# Altium PCB Nibbler_PC.PcbDoc (part 1 of 2)
Units mm, origin at the board's own origin, x right, y up, seen from the top; angles counter-clockwise.
Board outline 160.02 x 119.89 mm, 2 copper layers (Top Layer, Bottom Layer); 63 components, 94 nets, 437 pads, 181 vias.
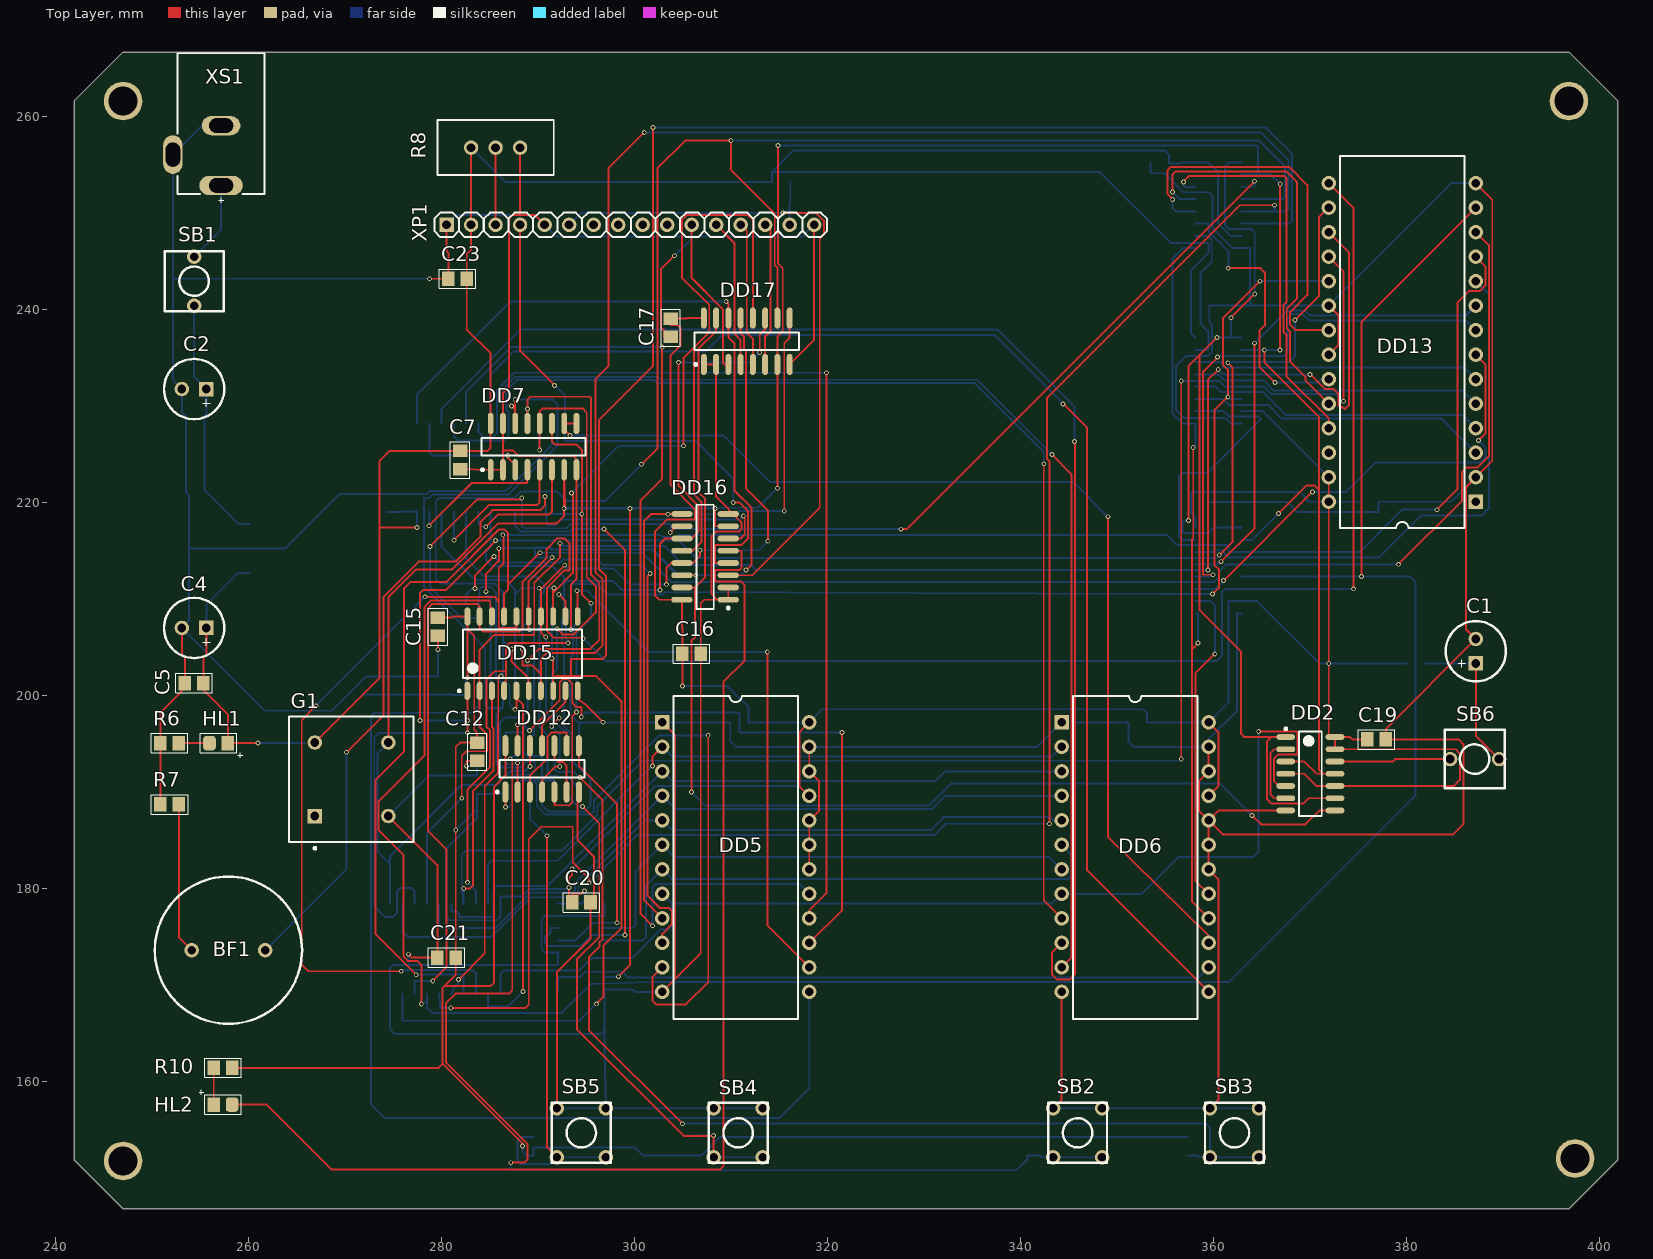
[diagram p0: Top Layer view]
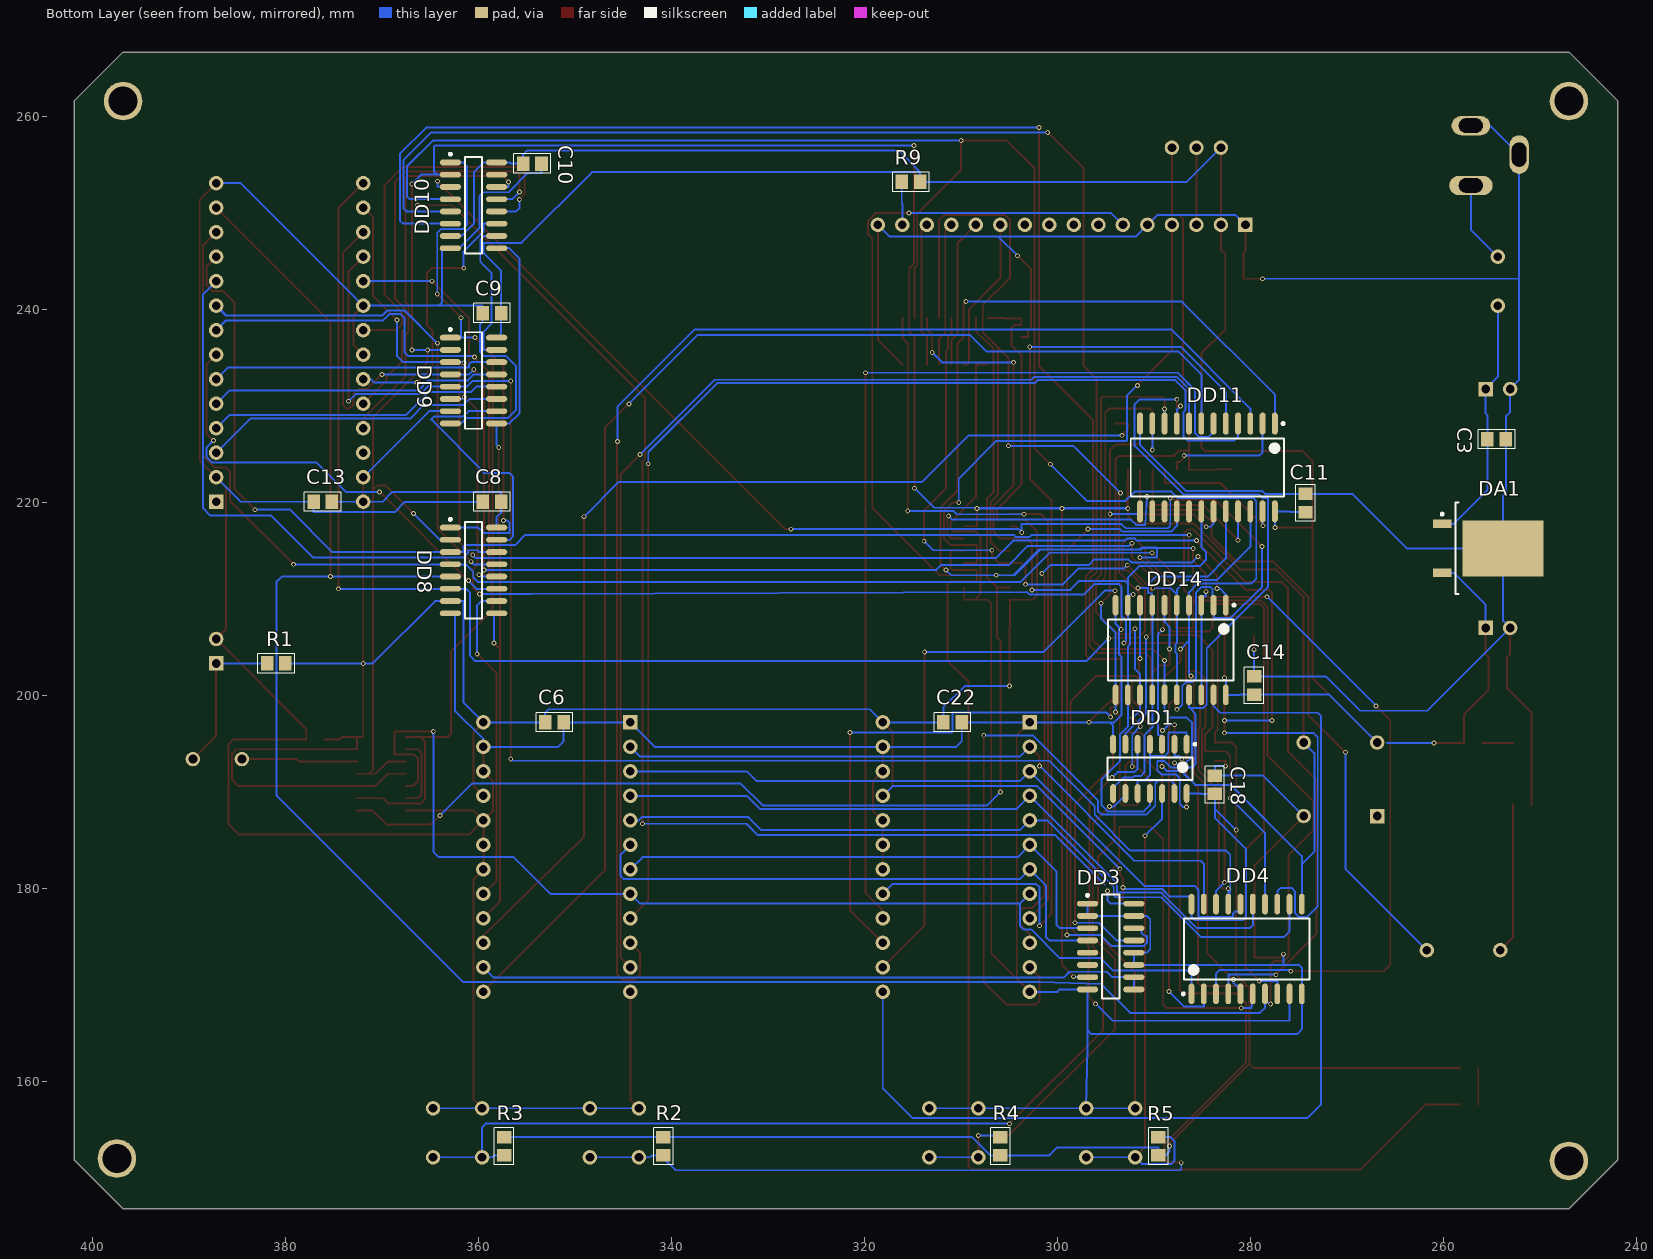
[diagram p1: Bottom Layer view, seen from below]

## Layer stack, top to bottom
Top Solder: solder mask 0.0102, Solder Resist, Dk 3.5
Top Layer: signal copper 0.0356
Dielectric 1: dielectric 0.32, FR-4, Dk 4.8
Bottom Layer: signal copper 0.0356
Bottom Solder: solder mask 0.0102, Solder Resist, Dk 3.5

## Board outline
241.935,151.892 241.935,261.62 247.015,266.7 396.875,266.7 401.955,261.62 401.955,151.892 396.875,146.812 247.015,146.812

## Design rules (kind name [scope] priority, off if disabled: settings)
Clearance [All] p1: gap=0.15
PolygonConnect [All] p1: connectstyle=Relief reliefconductorwidth=0.254 reliefentries=4 polygonreliefangle="90 Angle" airgapwidth=0.254
RoutingVias [All] p1: holewidth=0.3 width=0.5 viastyle="Through Hole" minholewidth=0.3 minwidth=0.5 maxholewidth=0.3 maxwidth=0.5
SolderMaskExpansion [All] p1: expansion=0.102
Width [All] p1: maxlimit=0.25 minlimit=0.15 preferedwidth=0.2
29 further rules are at their usual default settings.

## Components (designator, comment, footprint, x,y, rotation, side; value= is the part's Value field where it differs from the comment)
BF1 "BUZZER" BUZZER 257.937,173.609 r0 top
C1 "EL_CAPACITOR" ELECTROLITE 387.223,204.597 r180 top
C2 "EL_CAPACITOR" ELECTROLITE 254.381,231.775 r270 top
C3 "CAPACITOR" C0805 254.508,226.568 r180 bottom
C4 "EL_CAPACITOR" ELECTROLITE 254.381,207.01 r270 top
C5 "CAPACITOR" C0805 254.381,201.295 r180 top
C6 "CAPACITOR" C0805 352.171,197.231 r180 bottom
C7 "CAPACITOR" C0805 281.94,224.409 r270 top
C8 "CAPACITOR" C0805 358.648,220.083 r0 bottom
C9 "CAPACITOR" C0805 358.648,239.641 r0 bottom
C10 "CAPACITOR" C0805 354.457,255.135 r180 bottom
C11 "CAPACITOR" C0805 274.32,219.964 r90 bottom
C12 "CAPACITOR" C0805 283.718,194.183 r270 top
C13 "CAPACITOR" C0805 376.174,220.091 r0 bottom
C14 "CAPACITOR" C0805 279.654,201.041 r90 bottom
C15 "CAPACITOR" C0805 279.654,207.137 r270 top
C16 "CAPACITOR" C0805 305.943,204.343 r0 top
C17 "CAPACITOR" C0805 303.784,238.125 r270 top
C18 "CAPACITOR" C0805 283.718,190.754 r90 bottom
C19 "CAPACITOR" C0805 376.936,195.453 r0 top
C20 "CAPACITOR" C0805 294.513,178.562 r0 top
C21 "CAPACITOR" C0805 280.543,172.847 r180 top
C22 "CAPACITOR" C0805 310.896,197.231 r180 bottom
C23 "CAPACITOR" C0805 281.686,243.205 r180 top
DA1 "LM7805" DPAK254P1054X203-3N 255.397,215.265 r180 bottom
DD1 "74HCT125" SOIC-14 290.449,192.405 r270 bottom
DD2 "74HCT74" SOIC-14 370.078,191.897 r0 top
DD3 "74HCT173" SOIC-16 294.513,173.99 r180 bottom
DD4 "74HCT377" SOIC-20 280.416,173.736 r90 bottom
DD5 "28C16" DIP-24 309.245,174.371 r270 top
DD6 "28C16" DIP-24 350.647,174.371 r270 top
DD7 "74HCT173" SOIC-16 289.56,225.806 r90 top
DD8 "74HCT163" M16A_N 360.553,212.971 r180 bottom
DD9 "74HCT163" M16A_N 360.553,232.656 r180 bottom
DD10 "74HCT163" M16A_N 360.553,250.817 r180 bottom
DD11 "74LS181" DW024_N 284.48,223.647 r270 bottom
DD12 "74LS32" D014_N 290.449,192.405 r90 top
DD13 "28C64" DIP-28 379.603,244.221 r90 top
DD14 "74HCT244" SOIC-20 288.29,204.724 r270 bottom
DD15 "CY7C168A" SOJ-20 288.417,204.343 r90 top
DD16 "74HCT173" SOIC-16 307.34,214.376 r180 top
DD17 "74HCT173" SOIC-16 311.658,236.728 r90 top
G1 "GENERATOR" ZZ105 270.637,191.135 r0 top
HL1 "LED" "C0805 - LED" 256.921,195.072 r180 top
HL2 "LED" "C0805 - LED" 257.363,157.607 r0 top
R1 "RESISTOR" C0805 381,203.327 r180 bottom
R2 "RESISTOR" C0805 340.868,153.289 r90 bottom
R3 "RESISTOR" C0805 357.378,153.289 r90 bottom
R4 "RESISTOR" C0805 305.943,153.289 r270 bottom
R5 "RESISTOR" C0805 289.56,153.289 r270 bottom
R6 "RESISTOR" C0805 251.841,195.072 r180 top
R7 "RESISTOR" C0805 251.841,188.722 r0 top
R8 "VARIABLE RES" V_RES 285.623,256.794 r180 top
R9 "RESISTOR" C0805 315.214,253.238 r0 bottom
R10 "RESISTOR" C0805 257.363,161.417 r180 top
SB1 "BUTTON_3" BUTTON1 254.381,242.951 r0 top
SB2 "BUTTON_2" BUTTON2 345.948,154.686 r0 top
SB3 "BUTTON_2" BUTTON2 362.204,154.686 r0 top
SB4 "BUTTON_2" BUTTON2 310.769,154.686 r0 top
SB5 "BUTTON_2" BUTTON2 294.513,154.686 r0 top
SB6 "BUTTON" BUTTON1 387.096,193.421 r270 top
XP1 "OUTPUT" STECKER 299.593,248.793 r0 top (schematic designator X2)
XS1 "INPUT" KLD-0202 257.175,266.573 r270 top (schematic designator XP1)

## Footprints (in the part's own frame and the unit in brackets; to place one, negate y for a bottom-side part, rotate by r counter-clockwise, add the part's x,y. Pads: shape width x height; smd on the part's side, far side on the other; paste and mask are expansions set on the pad)
BUTTON1 [mm]
  round 1.5 hole 0.9: 1(0,2.54) 2(0,-2.54)
  silkscreen extent -3.05,-3.11 3.05,3.11
BUTTON2 [mm]
  round 1.5 hole 0.9: 1(-2.54,2.54) 2(2.54,2.54) 3(-2.54,-2.54) 4(2.54,-2.54)
  silkscreen extent -3.05,-3.11 3.05,3.11
BUZZER [mm]
  round 1.5 hole 0.9: 1(-3.81,0) 2(3.81,0)
  silkscreen extent -7.63,-7.63 7.63,7.63
C0805 [mm] "Chip Capacitor; Body 2.0 x 1.2 mm (LxW typ)"
  rect 1.3x1.5 smd: 1(-0.95,0) 2(0.95,0)
  silkscreen extent -1.9,-1 1.91,1
"C0805 - LED" [mm] "Chip Capacitor; Body 2.0 x 1.2 mm (LxW typ)"
  rect 1.3x1.5 smd: 1(-0.95,0)
  rrect50% 1.3x1.5 smd: 2(0.95,0)
  silkscreen extent -2.48,-1 1.91,1.52
D014_N [mm] "14-Pin Small Outline Integrated Circuit 1.27 mm Pitch, IPC Medium Density"
  oval 2.2x0.6 smd: 1(-2.4,3.81) 2(-2.4,2.54) 3(-2.4,1.27) 4(-2.4,0) 5(-2.4,-1.27) 6(-2.4,-2.54) 7(-2.4,-3.81) 8(2.4,-3.81) 9(2.4,-2.54) 10(2.4,-1.27) 11(2.4,0) 12(2.4,1.27) 13(2.4,2.54) 14(2.4,3.81)
  silkscreen extent -2.52,-4.4 0.9,4.78, body extent -1.95,-4.33 1.95,4.33, height 1.75
DIP-24 [mm] "DIP; 40 Leads; Row Spacing 15.24 mm; Pitch 2.54 mm"
  rect 1.5x1.5 hole 0.9: 1(-22.86,-6.35)
  round 1.5 hole 0.9: 2(-20.32,-6.35) 3(-17.78,-6.35) 4(-15.24,-6.35) 5(-12.7,-6.35) 6(-10.16,-6.35) 7(-7.62,-6.35) 8(-5.08,-6.35) 9(-2.54,-6.35) 10(0,-6.35) 11(2.54,-6.35) 12(5.08,-6.35) 13(5.08,8.89) 14(2.54,8.89) 15(0,8.89) 16(-2.54,8.89) 17(-5.08,8.89) 18(-7.62,8.89) 19(-10.16,8.89) 20(-12.7,8.89) 21(-15.24,8.89) 22(-17.78,8.89) 23(-20.32,8.89) 24(-22.86,8.89)
  silkscreen extent -25.58,-5.18 7.87,7.72
DIP-28 [mm] "DIP; 40 Leads; Row Spacing 15.24 mm; Pitch 2.54 mm"
  rect 1.5x1.5 hole 0.9: 1(-24.13,-7.62)
  round 1.5 hole 0.9: 2(-21.59,-7.62) 3(-19.05,-7.62) 4(-16.51,-7.62) 5(-13.97,-7.62) 6(-11.43,-7.62) 7(-8.89,-7.62) 8(-6.35,-7.62) 9(-3.81,-7.62) 10(-1.27,-7.62) 11(1.27,-7.62) 12(3.81,-7.62) 13(6.35,-7.62) 14(8.89,-7.62) 15(8.89,7.62) 16(6.35,7.62) 17(3.81,7.62) 18(1.27,7.62) 19(-1.27,7.62) 20(-3.81,7.62) 21(-6.35,7.62) 22(-8.89,7.62) 23(-11.43,7.62) 24(-13.97,7.62) 25(-16.51,7.62) 26(-19.05,7.62) 27(-21.59,7.62) 28(-24.13,7.62)
  silkscreen extent -26.85,-6.45 11.68,6.45
DPAK254P1054X203-3N [mm] "D-PAK, 3-Pads, Body 7,17x8,12mm (max), IPC Medium Density"
  rect 1.95x0.9 smd: 1(-4.75,2.54) 3(-4.75,-2.54)
  rect 8.4x5.8 smd: 2(1.55,0)
  silkscreen extent -4.88,-4.75 -3.05,4.75, body extent -3.85,-4.75 4.28,4.75, height 2.03
DW024_N [mm] "24-Pin Plastic Small Outline Integrated Circuit 1.27 mm Pitch, IPC Medium Density"
  oval 2.3x0.6 smd: 1(-4.55,6.985) 2(-4.55,5.715) 3(-4.55,4.445) 4(-4.55,3.175) 5(-4.55,1.905) 6(-4.55,0.635) 7(-4.55,-0.635) 8(-4.55,-1.905) 9(-4.55,-3.175) 10(-4.55,-4.445) 11(-4.55,-5.715) 12(-4.55,-6.985) 13(4.55,-6.985) 14(4.55,-5.715) 15(4.55,-4.445) 16(4.55,-3.175) 17(4.55,-1.905) 18(4.55,-0.635) 19(4.55,0.635) 20(4.55,1.905) 21(4.55,3.175) 22(4.55,4.445) 23(4.55,5.715) 24(4.55,6.985)
  silkscreen extent -4.67,-7.95 3,7.96, body extent -3.8,-7.8 3.8,7.8, height 2.65
ELECTROLITE [mm]
  rect 1.5x1.5 hole 0.9: 1(0,1.27)
  round 1.5 hole 0.9: 2(0,-1.27)
  silkscreen extent -3.12,-3.12 3.12,3.12
KLD-0202 [mm] "DC Power Jack, 2.5mm, KLD Series, PCB Mount"
  oval 2x4.5 hole 1.5 slot 2.5 at 90 deg: 1(13.7,0)
  oval 2x4 hole 1.5 slot 2.5 at 90 deg: 2(7.5,0)
  oval 4x2 hole 1.5 slot 2.5 at 0 deg: 3(10.5,-5)
  silkscreen extent 0,-4.5 15.49,4.5
M16A_N [mm] "16-Pin Small Outline Integrated Circuit 1.27 mm Pitch, IPC Medium Density"
  oval 2.2x0.6 smd: 1(-2.4,4.445) 2(-2.4,3.175) 3(-2.4,1.905) 4(-2.4,0.635) 5(-2.4,-0.635) 6(-2.4,-1.905) 7(-2.4,-3.175) 8(-2.4,-4.445) 9(2.4,-4.445) 10(2.4,-3.175) 11(2.4,-1.905) 12(2.4,-0.635) 13(2.4,0.635) 14(2.4,1.905) 15(2.4,3.175) 16(2.4,4.445)
  silkscreen extent -2.53,-5 0.9,5.42, body extent -1.95,-4.95 1.95,4.95, height 1.75
SOIC-14 [mm]
  oval 1.95x0.6 smd: 1(-2.55,3.81) 2(-2.55,2.54) 3(-2.55,1.27) 4(-2.55,0) 5(-2.55,-1.27) 6(-2.55,-2.54) 7(-2.55,-3.81) 8(2.55,-3.81) 9(2.55,-2.54) 10(2.55,-1.27) 11(2.55,0) 12(2.55,1.27) 13(2.55,2.54) 14(2.55,3.81)
  silkscreen extent -2.67,-4.4 1.18,4.78, body extent -2,-4.4 2,4.4, height 1.75
SOIC-16 [mm] "SOIC, 16-Leads, Body 10,40x3,90mm, Pitch 1,27mm, IPC Medium Density"
  oval 2.2x0.6 smd: 1(-2.4,4.445) 2(-2.4,3.175) 3(-2.4,1.905) 4(-2.4,0.635) 5(-2.4,-0.635) 6(-2.4,-1.905) 7(-2.4,-3.175) 8(-2.4,-4.445) 9(2.4,-4.445) 10(2.4,-3.175) 11(2.4,-1.905) 12(2.4,-0.635) 13(2.4,0.635) 14(2.4,1.905) 15(2.4,3.175) 16(2.4,4.445)
  silkscreen extent -2.53,-5.4 0.9,5.42, body extent -2,-5.4 2,5.4, height 1.75
SOIC-20 [mm] "SOIC, 20-Leads, Body 12,80x7,50mm, Pitch 1,27mm, IPC Medium Density"
  oval 2.15x0.6 smd: 1(-4.65,5.715) 2(-4.65,4.445) 3(-4.65,3.175) 4(-4.65,1.905) 5(-4.65,0.635) 6(-4.65,-0.635) 7(-4.65,-1.905) 8(-4.65,-3.175) 9(-4.65,-4.445) 10(-4.65,-5.715) 11(4.65,-5.715) 12(4.65,-4.445) 13(4.65,-3.175) 14(4.65,-1.905) 15(4.65,-0.635) 16(4.65,0.635) 17(4.65,1.905) 18(4.65,3.175) 19(4.65,4.445) 20(4.65,5.715)
  silkscreen extent -4.77,-6.5 3.18,6.69, body extent -3.8,-6.5 3.8,6.5, height 2.65
SOJ-20 [mm] "SOJ, 20-Leads, Body 12,31x8,16mm, Pitch 1,27mm, IPC Low Density"
  oval 1.9x0.6 smd: 1(-3.85,5.715) 2(-3.85,4.445) 3(-3.85,3.175) 4(-3.85,1.905) 5(-3.85,0.635) 6(-3.85,-0.635) 7(-3.85,-1.905) 8(-3.85,-3.175) 9(-3.85,-4.445) 10(-3.85,-5.715) 11(3.85,-5.715) 12(3.85,-4.445) 13(3.85,-3.175) 14(3.85,-1.905) 15(3.85,-0.635) 16(3.85,0.635) 17(3.85,1.905) 18(3.85,3.175) 19(3.85,4.445) 20(3.85,5.715)
  silkscreen extent -3.97,-6.15 2.5,6.69, body extent -3.6,-6.15 3.6,6.15, height 3.36
STECKER [mm] "DIP; 40 Leads; Row Spacing 15.24 mm; Pitch 2.54 mm"
  rect 1.5x1.5 hole 0.9: 1(-19.05,0)
  round 1.5 hole 0.9: 2(-16.51,0) 3(-13.97,0) 4(-11.43,0) 5(-8.89,0) 6(-6.35,0) 7(-3.81,0) 8(-1.27,0) 9(1.27,0) 10(3.81,0) 11(6.35,0) 12(8.89,0) 13(11.43,0) 14(13.97,0) 15(16.51,0) 16(19.05,0)
  silkscreen extent -20.32,-1.27 20.38,1.27
V_RES [mm]
  round 1.5 hole 0.9: 1(-2.54,0) 2(0,0) 3(2.54,0)
  silkscreen extent -6.03,-2.86 6.03,2.86
ZZ105 [mm] "DIP; 14 Round Pins; Row Space 7.62 mm; Pitch 2.54 mm"
  rect 1.5x1.5 hole 0.9: 1(-3.746,-3.619)
  round 1.5 hole 0.9: 4(3.873,-3.619) 5(3.873,4) 8(-3.746,4)
  silkscreen extent -6.43,-7.08 6.48,6.69

## Part data
BF1: "П'єзок.динамік"
C1 C2 C4: "Кондесатор елктр."
C3 C5 C6 C7 C8 C9 C10 C11 C12 C13 C14 C15 C16 C17 C18 C19 C20 C21 C22 C23: "Конденс. керам."
DA1: "V_REGULATOR"
DD1: "4 буферні елем."
DD2: library part 74HCT74_, "Два D-трирери"
DD3 DD7 DD17: "4-розр. регістр"
DD4: "8-розр. регістр"
DD5 DD6: library part AT28C16, "16K EEPROM"
DD8 DD9 DD10: "4-розр. дв. ліч."
DD11: "Швийкісний ALU"
DD12: "4 елем. 2АБО"
DD13: library part AT28C64, "64K EEPROM"
DD14: library part 74HCT244_, "Драйвер шини"
DD15: "Статичний ОЗП"
DD16: library part 74HCT173_2
G1: "Генератор кварц"
HL1 HL2: "Світлодіод"
R1 R2 R3 R4 R5 R6 R7 R9 R10: "Резистор постійний"
R8: "Резистор змінний"
SB1: "Копка з фіксац"
SB2 SB3 SB4 SB5 SB6: "Копка натискна"

## Free pads (board coordinates)
  round 4 hole 3: 0(247.015,151.765) 0(247.015,261.62) 0(396.875,261.62) 0(397.51,152.019)

## Via types
v1: diameter 0.5, hole 0.3, Top Layer to Bottom Layer, 181 vias

## Nets (pads, with @x,y where several pads share a name; then routed paths per layer and width w, separated by ;. In a path a pad name is that pad's centre, name@x,y a point inside that pad or via, vN(x,y) a via of type N, cw(c..) or ccw(c..) an arc to the next point about the centre after c; other vN are vias at no path point)
/CSRAM: DD5.15 DD12.13 | length 68.1
  Top Layer w0.2: DD12.13@287.909,194.805 v1(287.909,196.977) ; v1(289.128,196.367) 292.278,199.517 292.278,201.397 292.574,201.693 293.099,201.693 293.573,201.219 293.573,199.238 294.005,198.806 294.488,198.806 294.513,198.78 v1(294.513,197.79) ; DD5.15@318.135,174.371 321.539,177.775 v1(321.539,196.19)
  Bottom Layer w0.2: v1(287.909,196.977) 288.519,196.977 v1(289.128,196.367) ; v1(294.513,197.79) 294.97,198.247 310.845,198.247 310.921,198.171 310.921,196.215 310.947,196.19 v1(321.539,196.19)
/LOADA: DD6.15 DD7.9 DD7.10 | length 110.6
  Top Layer w0.2: v1(293.345,226.974) 292.735,227.584 DD7.10@292.735,228.206 DD7.9@294.005,228.206 ; v1(349.098,218.542) 349.098,185.36 359.537,175.108 DD6.15@359.537,174.371
  Bottom Layer w0.2: v1(293.345,226.974) 309.22,226.974 314.046,222.148 345.491,222.148 v1(349.098,218.542)
/LOADFLAGS: DD3.9 DD3.10 DD6.14 | length 69.6
  Bottom Layer w0.2: DD3.9@292.113,169.545 DD3.10@292.113,170.815 294.335,170.815 294.894,171.374 298.78,171.374 299.39,170.764 358.47,170.764 DD6.14@359.537,171.831
/LOADOUT: DD5.9 DD16.9 DD17.9 | length 78.6
  Top Layer w0.2: DD5.9@302.895,176.911 301.029,178.777 301.029,218.098 301.752,218.821 v1@303.53,218.821 ; v1(303.505,218.796) v1@303.53,218.821 ; DD16.9@304.94,218.821 v1@303.53,218.821 ; v1(315.544,219.122) 315.544,236.525 316.103,237.084 DD17.9@316.103,239.128
  Bottom Layer w0.2: v1(303.505,218.796) 310.473,218.796 310.799,219.122 v1(315.544,219.122)
/LOADPC: DD6.16 DD8.9 DD9.9 DD10.9 | length 78.1
  Top Layer w0.2: v1(357.937,225.73) 357.937,216.357 357.81,216.23 357.81,204.826 ; v1(358.445,205.461) 357.81,204.826 ; DD6.16@359.537,176.911 357.81,178.638 357.81,204.826
  Bottom Layer w0.2: v1(357.937,225.73) 358.165,225.958 358.165,228.211 DD9.9@358.153,228.211 356.827,228.211 355.803,229.235 355.803,245.305 356.87,246.372 DD10.9@358.153,246.372 ; DD8.9@358.153,208.526 358.445,208.526 v1(358.445,205.461)
/OEALU: DD5.13 DD14.19 | length 110.3
  Bottom Layer w0.2: DD14.19@283.845,200.074 283.845,198.895 283.172,198.222 273.05,198.222 272.694,197.866 272.694,157.632 274.117,156.21 315.049,156.21 318.135,159.296 DD5.13@318.135,169.291
/OEIN: DD1.1 DD1.4 DD1.10 DD1.13 DD5.11 | length 79.5
  Top Layer w0.2: DD5.11@302.895,171.831 301.879,170.815 301.879,168.377 302.26,167.996 305.359,167.996 307.67,170.307 v1(307.67,195.881)
  Bottom Layer w0.2: DD1.1@286.639,194.955 286.639,196.155 286.664,196.18 288.468,196.18 288.544,196.104 288.544,194.107 288.925,193.726 290.424,193.726 290.449,193.751 ; DD1.13@287.909,189.855 287.909,190.83 288.29,191.211 289.56,191.211 ; DD1.4@290.449,194.955 290.449,193.751 ; DD1.10@291.719,189.855 291.719,191.186 291.694,191.211 ; v1(307.67,195.881) 302.586,195.881 295.809,189.104 295.809,188.004 295.461,187.656 290.829,187.656 289.89,188.595 289.89,190.881 289.56,191.211 ; 289.56,191.211 291.694,191.211 ; 290.449,193.751 290.449,191.744 290.928,191.265 291.64,191.265 291.694,191.211
/OEOPRND: DD5.10 DD14.1 | length 64
  Top Layer w0.2: v1(283.477,211.112) 283.477,212.446 v1(285.458,214.427) ; v1(301.65,212.649) 301.379,212.377 301.379,179.265 302.666,177.978 303.606,177.978 303.895,177.689 303.895,176.285 302.895,175.285 DD5.10@302.895,174.371
  Bottom Layer w0.2: DD14.1@282.575,209.374 282.575,210.477 283.21,211.112 v1(283.477,211.112) ; v1(285.458,214.427) 286.077,213.808 292.354,213.808 292.668,214.122 296.189,214.122 296.787,213.525 300.775,213.525 v1(301.65,212.649)
/RESET: DD2.1 DD2.9 DD8.1 DD9.1 DD10.1 | length 114.1
  Top Layer w0.2: v1(357.429,218.135) 357.429,234.137 358.597,235.306 ; v1(360.393,237.101) 358.597,235.306 ; v1(361.848,239.166) v1(364.312,241.63) ; DD2.1@367.528,195.707 366.027,195.707 ; DD2.9@372.628,189.357 369.887,189.357 369.329,188.798 366.014,188.798 365.582,189.23 365.582,195.262 366.027,195.707 ; 358.597,235.306 358.597,208.839 362.902,204.534 362.902,196.024 363.22,195.707 366.027,195.707
  Bottom Layer w0.2: v1(357.429,218.135) 357.006,218.135 356.803,217.932 356.803,216.891 356.828,216.865 359.512,216.865 360.062,217.416 DD8.1@362.953,217.416 ; v1(360.393,237.101) 361.848,237.101 ; v1(361.848,239.166) 361.848,237.101 ; DD9.1@362.953,237.101 361.848,237.101 ; DD10.1@362.953,255.262 361.632,255.262 361.239,254.868 361.239,248.755 361.632,248.361 363.918,248.361 364.312,247.968 v1(364.312,241.63)
/WERAM: DD5.14 DD15.11 | length 59.6
  Top Layer w0.2: v1(294.056,210.871) 294.132,210.795 DD15.11@294.132,208.193 ; v1(313.792,204.521) 313.792,176.174 DD5.14@318.135,171.831
  Bottom Layer w0.2: v1(294.056,210.871) 295.123,210.871 301.473,204.521 v1(313.792,204.521)
CLK: DD2.3 DD2.11 DD3.7 DD4.11 DD7.7 DD8.2 DD9.2 DD10.2 DD12.12 DD16.7 DD17.7 G1.5 | length 353.9
  Top Layer w0.2: G1.5@274.51,195.135 274.51,210.172 277.419,213.081 281.153,213.081 285.911,217.839 291.944,217.839 292.735,218.63 v1(292.735,219.405) DD7.7@292.735,223.406 v1@292.802,219.406 ; v1(289.179,192.659) DD12.12@289.179,194.805 ; v1@292.802,219.405 v1@292.802,219.472 ; v1(298.348,170.866) 299.568,172.085 v1(299.568,219.405) ; v1(308.381,219.405) 308.381,217.576 DD16.7@309.74,217.551 ; v1(314.833,221.488) DD17.7@314.833,234.328 314.833,237.211 315.392,237.769 315.392,244.297 314.913,244.776 v1(314.913,257.023) ; v1(365.303,235.831) 365.303,234.565 370.967,228.901 370.967,221.323 ; v1(366.759,218.872) 369.654,221.767 370.522,221.767 370.967,221.323 ; v1(366.928,235.831) 366.928,253.001 v1(366.954,253.027) ; DD2.3@367.528,193.167 369.443,193.167 370.713,191.897 371.399,191.897 ; DD2.11@372.628,191.897 371.399,191.897 ; 370.967,221.323 370.967,192.329 371.399,191.897
  Bottom Layer w0.2: G1.5@274.51,195.135 273.406,194.031 273.406,183.815 274.701,182.519 ; DD4.11@274.701,178.386 274.701,182.519 ; v1(289.179,192.659) 288.704,192.184 287.18,192.184 285.75,190.754 282.092,190.754 274.701,183.363 274.701,182.519 ; v1(292.735,219.405) v1(299.568,219.405) v1(308.381,219.405) ; v1@292.802,219.472 312.817,219.472 v1(314.833,221.488) ; DD3.7@296.913,170.815 298.298,170.815 v1(298.348,170.866) ; v1(314.913,257.023) 364.515,257.023 364.653,256.885 364.653,254.358 364.287,253.992 ; DD8.2@362.953,216.146 364.033,216.146 v1(366.759,218.872) ; DD9.2@362.953,235.831 v1(365.303,235.831) v1(366.928,235.831) ; DD10.2@362.953,253.992 364.287,253.992 ; v1(366.954,253.027) 365.989,253.992 364.287,253.992
CN+4: DD3.14 DD11.16 | length 65.6
  Top Layer w0.2: v1(296.85,217.272) 299.046,215.075 v1(299.046,175.184)
  Bottom Layer w0.2: DD11.16@287.655,219.097 287.655,217.589 288.247,216.997 293.314,216.997 293.589,217.272 v1(296.85,217.272) ; DD3.14@292.113,175.895 291.313,175.895 291.313,175.387 291.033,175.108 290.788,175.108 290.763,175.082 290.763,174.362 291.059,174.066 294.437,174.066 295.554,175.184 v1(299.046,175.184)
DATA0: DD1.3 DD11.1 DD14.3 DD14.18 DD15.15 DD16.14 DD17.14 | length 142.5
  Top Layer w0.2: v1(284.632,210.769) 284.632,212.631 285.958,213.957 v1(285.958,215.256) ; v1(289.128,206.832) 289.052,206.908 DD15.15@289.052,208.193 289.052,211.869 v1(291.49,214.308) ; DD16.14@304.94,212.471 v1(306.375,212.471) ; v1(309.524,240.843) 309.753,240.614 DD17.14@309.753,239.128 309.753,237.16 310.388,236.525 310.388,221.232 312.152,219.468 312.152,213.575 v1(311.582,213.004)
  Bottom Layer w0.2: DD11.1@277.495,228.197 277.495,231.216 287.122,240.843 v1(309.524,240.843) ; v1(284.632,210.769) 284.632,210.337 284.658,210.312 285.115,210.312 DD14.3@285.115,209.374 DD14.18@285.115,200.074 ; v1(285.958,215.256) 286.018,215.316 289.726,215.316 ; v1(289.128,206.832) 289.628,206.332 289.628,195.91 289.179,195.867 DD1.3@289.179,194.955 ; v1(291.49,214.308) 289.738,214.308 289.712,214.333 289.712,215.303 289.726,215.316 ; v1(311.582,213.004) 311.048,212.471 v1(306.375,212.471) 304.622,212.471 ; 289.726,215.316 289.738,215.328 291.159,215.328 291.171,215.316 ; 289.726,215.316 291.171,215.316 ; 291.171,215.316 291.329,215.158 291.496,215.158 ; 291.171,215.316 291.338,215.316 291.496,215.158 ; 291.496,215.158 301.783,215.158 ; 301.783,215.158 301.935,215.158 304.622,212.471 ; 301.783,215.158 304.47,212.471 304.622,212.471
DATA1: DD1.6 DD11.22 DD14.5 DD14.16 DD15.14 DD16.13 DD17.13 | length 97.2
  Top Layer w0.2: v1(290.83,206.07) 290.322,206.578 DD15.14@290.322,208.193 290.322,210.947 v1(290.144,211.125) 290.387,211.125 292.775,213.512 v1(292.786,213.512) ; v1(303.352,211.531) 303.352,213.284 303.809,213.741 DD16.13@304.94,213.741 306.07,213.741 306.832,214.503 v1(306.832,215.062) ; DD17.13@311.023,239.128 311.023,237.561 311.373,237.211 311.373,235.895 311.582,235.687 311.582,221.456 313.842,219.196 v1(313.842,216.002)
  Bottom Layer w0.2: DD11.22@280.035,219.097 280.035,215.446 283.506,211.975 286.665,211.975 287.655,210.985 287.655,210.49 ; DD14.16@287.655,200.074 287.655,204.324 287.774,204.443 287.774,205.324 287.655,205.443 DD14.5@287.655,209.374 287.655,210.49 ; v1(290.144,211.125) 288.29,211.125 287.655,210.49 ; v1(290.83,206.07) 290.83,198.183 292.989,196.024 DD1.6@292.989,194.955 ; v1(292.786,213.512) 293.124,213.175 297.813,213.175 299.456,211.531 v1(303.352,211.531) ; v1(306.832,215.062) 312.903,215.062 v1(313.842,216.002)
DATA2: DD1.8 DD11.20 DD14.7 DD14.14 DD15.13 DD16.12 DD17.12 | length 134.2
  Top Layer w0.2: DD15.13@291.592,208.193 291.592,210.672 ; v1(291.676,211.15) 291.592,211.066 291.592,210.672 ; v1(293.497,221.005) 293.645,220.857 293.645,212.725 291.592,210.672 ; DD16.12@304.94,215.011 306.07,215.011 306.99,215.931 306.99,220.04 306.172,220.859 306.172,236.068 ; v1(305.105,225.89) 305.105,235.001 306.172,236.068 ; DD17.12@312.293,239.128 312.293,249.301 311.785,249.809 305.435,249.809 304.927,249.301 304.927,243.332 307.772,240.487 307.772,237.668 306.172,236.068
  Bottom Layer w0.2: DD11.20@282.575,219.097 282.575,214.224 284.473,212.325 289.82,212.325 290.644,211.501 290.644,211.15 ; v1(291.676,211.15) 290.644,211.15 ; v1(293.497,221.005) 298.382,225.89 v1(305.105,225.89) ; DD1.8@294.259,189.855 294.259,190.449 293.18,191.528 292.18,191.528 292.059,191.649 291.387,191.649 291.008,192.029 291.008,195.897 290.195,196.71 DD14.14@290.195,200.074 DD14.7@290.195,209.374 290.22,210.565 290.644,210.642 290.644,211.15
DATA3: DD1.11 DD11.18 DD14.9 DD14.12 DD15.12 DD16.11 DD17.11 | length 99.7
  Top Layer w0.2: v1(292.176,210.49) 292.862,209.804 DD15.12@292.862,208.193 ; v1(302.666,210.96) 302.666,215.735 303.212,216.281 DD16.11@304.94,216.281 305.943,216.281 306.64,216.978 306.64,219.685 304.597,221.728 v1(304.597,234.544) ; v1(313.004,235.56) 313.004,237.388 313.563,237.947 DD17.11@313.563,239.128
  Bottom Layer w0.2: DD11.18@285.115,219.097 285.115,215.384 284.64,214.909 284.64,214.053 285.252,213.441 291.516,213.441 292.735,212.221 292.735,211.569 ; DD1.11@290.449,189.855 290.449,188.62 291.063,188.006 294.838,188.006 295.453,188.62 295.453,191.313 293.548,193.218 293.548,195.96 292.735,196.773 DD14.12@292.735,200.074 292.735,205.083 292.505,205.313 292.505,207.876 292.735,208.106 DD14.9@292.735,209.374 292.735,210.464 ; v1(292.176,210.49) 292.71,210.49 292.735,210.464 ; v1(302.666,210.96) 298.689,210.96 297.753,211.895 293.061,211.895 292.735,211.569 ; v1(304.597,234.544) 311.988,234.544 v1(313.004,235.56) ; 292.735,210.464 292.735,211.569
F0: DD7.14 DD11.9 DD12.1 DD14.17 | length 76.5
  Top Layer w0.2: v1(286.639,188.468) DD12.1@286.639,190.005 ; v1(287.274,230.022) 287.655,229.641 ; DD7.14@287.655,228.206 287.655,229.641 ; v1(287.655,230.708) 287.655,229.641
  Bottom Layer w0.2: DD14.17@286.385,200.074 286.385,198.78 ; v1(286.639,188.468) 287.02,188.468 287.35,188.798 287.35,191.452 287.719,191.821 289.243,191.821 289.687,192.265 289.687,193.192 289.662,193.218 288.912,193.218 288.228,192.534 286.074,192.534 285.725,192.883 285.725,198.12 286.334,198.73 ; v1(287.274,230.022) 287.655,229.641 DD11.9@287.655,228.197 ; v1(287.655,230.708) 291.503,230.708 292.024,230.188 292.024,225.874 286.997,220.847 279.135,220.847 278.785,220.497 278.232,220.497 278.206,220.472 278.206,211.249 284.556,204.899 284.556,199.072 284.899,198.73 286.334,198.73 ; 286.334,198.73 286.36,198.73 286.385,198.755 286.385,198.78 ; 286.334,198.73 286.385,198.78
F1: DD7.13 DD11.10 DD12.2 DD14.15 | length 61.9
  Top Layer w0.2: DD12.2@287.909,190.005 v1(287.909,193.034) ; v1(288.925,203.632) 290.137,204.844 295.457,204.844 296.366,205.754 296.366,211.695 295.529,212.533 295.529,230.822 295.377,230.975 289.243,230.975 288.925,230.657 v1(288.925,229.692) DD7.13@288.925,228.206
  Bottom Layer w0.2: v1(287.909,193.034) 287.759,192.884 286.871,192.884 286.08,193.675 286.08,197.167 286.626,197.714 288.328,197.714 288.925,198.31 DD14.15@288.925,200.074 v1(288.925,203.632) ; DD11.10@288.925,228.197 v1(288.925,229.692)
F2: DD7.12 DD11.11 DD12.4 DD14.13 | length 57.4
  Top Layer w0.2: v1(290.195,225.45) DD7.12@290.195,228.206 290.195,229.451 290.512,229.768 294.64,229.768 295.072,229.337 295.072,212.29 296.016,211.345 296.016,208.621 293.738,206.343 292.565,206.343 v1(291.981,206.927) ; DD12.4@290.449,190.005 290.449,191.262 291.821,192.634 v1(292.278,192.634) ; v1(291.44,196.799) 291.44,196.901 v1(292.227,197.688)
  Bottom Layer w0.2: v1(290.195,225.45) DD11.11@290.195,228.197 ; v1(291.44,196.799) 292.278,195.961 v1(292.278,192.634) ; v1(291.981,206.927) 291.981,202.751 291.465,202.235 DD14.13@291.465,200.074 291.465,198.45 v1(292.227,197.688)
F3: DD7.11 DD11.13 DD12.5 DD14.11 | length 49.8
  Top Layer w0.2: DD7.11@291.465,228.206 291.465,226.352 291.782,226.035 294.005,226.035 294.564,225.476 v1(294.564,218.821) 294.564,210.528 v1(295.516,209.575) ; DD12.5@291.719,190.005 291.719,188.646 293.256,188.62 293.573,188.938 293.573,197.866 v1(294.005,198.298)
  Bottom Layer w0.2: DD11.13@291.465,219.097 291.465,218.821 v1(294.564,218.821) ; v1(294.005,198.298) DD14.11@294.005,200.074 294.005,206.508 295.516,208.019 v1(295.516,209.575)
GND: C1.2 C2.2 C3.2 C4.2 C5.2 C6.2 C7.2 C8.2 C9.2 C10.2 C11.2 C12.2 C13.2 C14.2 C15.2 C16.2 C17.2 C18.2 C19.2 C20.2 C21.2 C22.2 C23.2 DA1.2 DD1.7 DD2.7 DD3.1 DD3.2 DD3.8 DD3.11 DD3.12 DD3.15 DD4.10 DD5.1 DD5.12 DD5.18 DD5.19 DD5.20 DD5.22 DD5.23 DD6.1 DD6.12 DD6.18 DD6.19 DD6.20 DD6.22 DD6.23 DD7.1 DD7.2 DD7.8 DD7.15 DD8.8 DD9.8 DD10.8 DD11.12 DD12.7 DD13.2 DD13.14 DD13.20 DD13.22 DD14.10 DD15.10 DD16.1 DD16.2 DD16.8 DD17.1 DD17.2 DD17.8 G1.4 R6.2 R7.1 R8.1 SB2.1 SB2.2 SB3.1 SB3.2 SB4.1 SB4.2 SB5.1 SB5.2 XP1.1 XP1.5 XP1.16 XS1.2 XS1.3 | length 1021.9
  Top Layer w0.2: R7.1@250.891,188.722 R6.2@250.891,195.072 250.891,198.196 253.431,200.736 C5.2@253.431,201.295 253.431,203.987 253.111,204.307 C4.2@253.111,207.01 ; G1.4@274.51,187.516 279.593,182.433 C21.2@279.593,172.847 276.95,172.847 v1(276.6,173.197) ; v1(278.79,243.205) C23.2@280.736,243.205 280.736,245.897 280.543,246.09 XP1.1@280.543,248.793 ; v1(279.654,204.76) C15.2@279.654,206.187 ; C7.2@281.94,223.459 283.489,223.459 283.542,223.406 DD7.1@285.115,223.406 DD7.2@286.385,223.406 286.385,225.381 ; v1(282.626,192.684) 282.626,193.208 282.651,193.233 C12.2@283.718,193.233 ; R8.1@288.163,256.794 288.163,249.822 ; XP1.5@290.703,248.793 289.674,249.822 288.163,249.822 ; SB5.1@291.973,157.226 291.973,171.323 295.463,174.813 C20.2@295.463,178.562 295.826,178.562 295.826,183.305 294.127,185.003 294.127,188.874 294.259,189.006 DD12.7@294.259,190.005 ; v1(293.421,206.858) 293.421,211.48 294.005,212.065 DD7.8@294.005,223.406 294.005,224.523 293.688,224.841 287.958,224.841 287.393,225.406 286.41,225.406 286.385,225.381 ; DD15.10@294.132,200.493 294.132,199.644 294.844,199.148 v1(296.761,197.231) ; DD5.12@302.895,169.291 304.245,170.641 ; DD5.1@302.895,197.231 304.245,195.881 304.245,170.641 ; C17.2@303.784,237.175 303.073,237.175 303.073,237.871 302.768,238.176 302.768,244.196 v1(304.165,245.593) ; DD17.1@307.213,234.328 DD17.2@308.483,234.328 308.483,220.599 ; 308.483,220.603 311.099,217.987 311.099,217.24 310.859,217 308.491,217 308.026,216.535 308.026,210.502 308.597,209.931 ; DD16.2@309.74,211.201 DD16.1@309.74,209.931 308.597,209.931 ; DD17.8@316.103,234.328 318.643,236.868 XP1.16@318.643,248.793 ; DD5.18@318.135,181.991 DD5.19@318.135,184.531 DD5.20@318.135,187.071 319.151,188.087 319.151,191.135 DD5.22@318.135,192.151 DD5.23@318.135,194.691 ; SB2.1@343.408,157.226 344.297,158.115 DD6.12@344.297,169.291 ; DD6.23@359.537,194.691 DD6.22@359.537,192.151 358.521,191.135 358.521,188.087 DD6.20@359.537,187.071 ; SB3.1@359.664,157.226 360.553,158.115 360.553,180.975 DD6.18@359.537,181.991 DD6.19@359.537,184.531 DD6.20@359.537,187.071 ; DD2.7@367.528,188.087 360.553,188.087 DD6.20@359.537,187.071 ; DD13.22@371.983,235.331 372.999,236.347 372.999,239.395 DD13.20@371.983,240.411 ; DD13.14@387.223,253.111 388.925,251.409 388.925,224.333 DD13.2@387.223,222.631 386.207,221.615 386.207,206.883 C1.2@387.223,205.867 377.886,196.53 C19.2@377.886,195.453 385.445,195.453 385.928,194.97 385.928,186.665 384.886,185.623 360.985,185.623 DD6.20@359.537,187.071 ; 286.385,225.381 DD7.15@286.385,228.206 286.385,231.343 287.02,231.978 287.02,249.434 287.407,249.822 288.163,249.822 ; 304.245,170.641 306.893,173.289 C16.2@306.893,204.343 306.893,209.55 307.274,209.931 308.597,209.931
  Bottom Layer w0.2: 252.222,243.205 v1(278.79,243.205) ; XS1.2@257.175,259.073 255.175,259.073 XS1.3@252.175,256.073 252.175,232.711 C2.2@253.111,231.775 253.111,229.377 253.558,228.93 C3.2@253.558,226.568 253.558,221.04 253.847,220.751 DA1.2@253.847,215.265 ; G1.4@274.51,187.516 278.699,191.704 C18.2@283.718,191.704 283.718,192.659 283.693,192.684 v1(282.626,192.684) ; 276.6,172.085 v1(276.6,173.197) ; v1(279.654,204.76) C14.2@279.654,201.991 272.222,201.991 268.656,198.425 261.696,198.425 C4.2@253.111,207.01 253.847,207.746 DA1.2@253.847,215.265 ; XP1.1@280.543,248.793 281.559,249.809 289.687,249.809 XP1.5@290.703,248.793 291.922,247.574 306.146,247.574 ; DD11.12@291.465,228.197 291.465,225.958 286.704,221.197 278.785,221.197 278.502,220.914 C11.2@274.32,220.914 269.479,220.914 263.83,215.265 DA1.2@253.847,215.265 ; SB5.1@291.973,157.226 SB5.2@297.053,157.226 ; v1(293.421,206.858) 293.649,207.086 ; DD14.10@294.005,209.374 294.005,207.442 293.649,207.086 ; DD1.7@294.259,194.955 294.259,196.85 294.64,197.231 ; DD3.1@296.913,178.435 DD3.2@296.913,177.165 DD3.15@292.113,177.165 290.779,177.165 290.413,176.799 290.413,173.721 290.779,173.355 DD3.12@292.113,173.355 DD3.11@292.113,172.085 275.018,172.085 274.701,171.767 DD4.10@274.701,169.086 274.701,165.417 275.196,164.922 296.545,164.922 296.913,165.29 ; DD5.12@302.895,169.291 300.025,169.291 299.771,169.545 DD3.8@296.913,169.545 296.913,165.29 ; v1(304.165,245.593) 306.146,247.574 ; SB4.2@313.309,157.226 SB4.1@308.229,157.226 SB5.2@297.053,157.226 ; XP1.16@318.643,248.793 317.424,247.574 306.146,247.574 ; SB2.1@343.408,157.226 SB2.2@348.488,157.226 SB3.1@359.664,157.226 SB3.2@364.744,157.226 ; C10.2@353.507,255.135 353.507,254.152 354.965,254.127 356.921,252.171 359.55,252.171 359.943,251.778 359.943,248.435 362.006,246.372 DD10.8@362.953,246.372 363.804,246.372 363.804,240.779 364.172,240.411 ; C8.2@359.598,220.083 367.673,220.083 368.732,219.024 377.124,219.05 C13.2@377.124,220.091 384.683,220.091 DD13.2@387.223,222.631 ; DD8.8@362.953,208.526 362.483,208.526 362.483,198.45 359.537,195.504 DD6.23@359.537,194.691 351.79,194.691 351.221,195.26 C6.2@351.221,197.231 DD6.1@344.297,197.231 341.757,194.691 DD5.23@318.135,194.691 310.515,194.691 309.946,195.26 C22.2@309.946,197.231 DD5.1@302.895,197.231 v1(296.761,197.231) 294.64,197.231 ; DD9.8@362.953,228.211 361.829,228.211 361.253,228.787 356.962,228.787 356.153,229.596 356.153,234.169 357.188,235.204 359.486,235.204 359.867,235.585 359.867,238.481 359.598,238.75 C9.2@359.598,239.641 359.598,240.398 359.611,240.411 364.172,240.411 ; DD13.14@387.223,253.111 384.683,253.111 DD13.20@371.983,240.411 364.172,240.411 ; 293.649,207.086 293.649,204.267 293.37,203.987 293.37,198.018 294.157,197.231 294.64,197.231 ; 296.913,165.29 296.913,163.513 SB5.2@297.053,157.226
INCPC: DD6.17 DD8.10 | length 33.5
  Top Layer w0.2: DD6.17@359.537,179.451 358.165,180.823 358.165,202.311 v1(360.172,204.318)
  Bottom Layer w0.2: DD8.10@358.153,209.796 359.727,209.796 360.172,209.351 v1(360.172,204.318)
INPUT: SB1.1 XS1.1 | length 8.5
  Bottom Layer w0.2: SB1.1@254.381,245.491 257.175,248.285 XS1.1@257.175,252.873
NetBF1_1: BF1.1 R7.2 | length 15.7
  Top Layer w0.2: R7.2@252.791,188.722 252.791,174.945 BF1.1@254.127,173.609
NetBF1_2: BF1.2 DD16.6 | length 91.7
  Top Layer w0.2: v1(270.18,194.132) 274.015,197.968 274.015,210.261 277.647,213.893 281.47,213.893 284.074,216.497 284.074,217.994 285.307,219.227 290.271,219.227 290.754,219.71 v1(290.754,220.624) ; DD16.6@309.74,216.281 311.017,216.281 311.449,216.713 311.449,218.471 v1(311.302,218.618)
  Bottom Layer w0.2: BF1.2@261.747,173.609 270.18,182.042 v1(270.18,194.132) ; v1(290.754,220.624) 290.932,217.697 291.878,217.697 292.417,218.237 310.921,218.237 v1(311.302,218.618)
NetC1_1: C1.1 R1.1 SB6.1 | length 16.2
  Top Layer w0.2: C1.1@387.223,203.327 387.223,195.834 SB6.1@389.636,193.421
  Bottom Layer w0.2: R1.1@381.95,203.327 C1.1@387.223,203.327
NetC2_1: C2.1 C3.1 DA1.1 SB1.2 | length 25.9
  Bottom Layer w0.2: SB1.2@254.381,240.411 254.381,233.045 C2.1@255.651,231.775 255.651,229.25 255.458,229.057 C3.1@255.458,226.568 255.458,221.3 258.953,217.805 DA1.1@260.147,217.805
NetC4_1: C4.1 C5.1 DA1.3 HL1.1 | length 29.4
  Top Layer w0.2: C4.1@255.651,207.01 255.651,204.307 255.331,203.987 C5.1@255.331,201.295 255.331,200.599 257.871,198.059 HL1.1@257.871,195.072 v1(260.985,195.072)
  Bottom Layer w0.2: C4.1@255.651,207.01 255.651,209.423 258.953,212.725 DA1.3@260.147,212.725 ; v1(260.985,195.072) 265.891,195.072